# Allegro board LAYOUT.brd
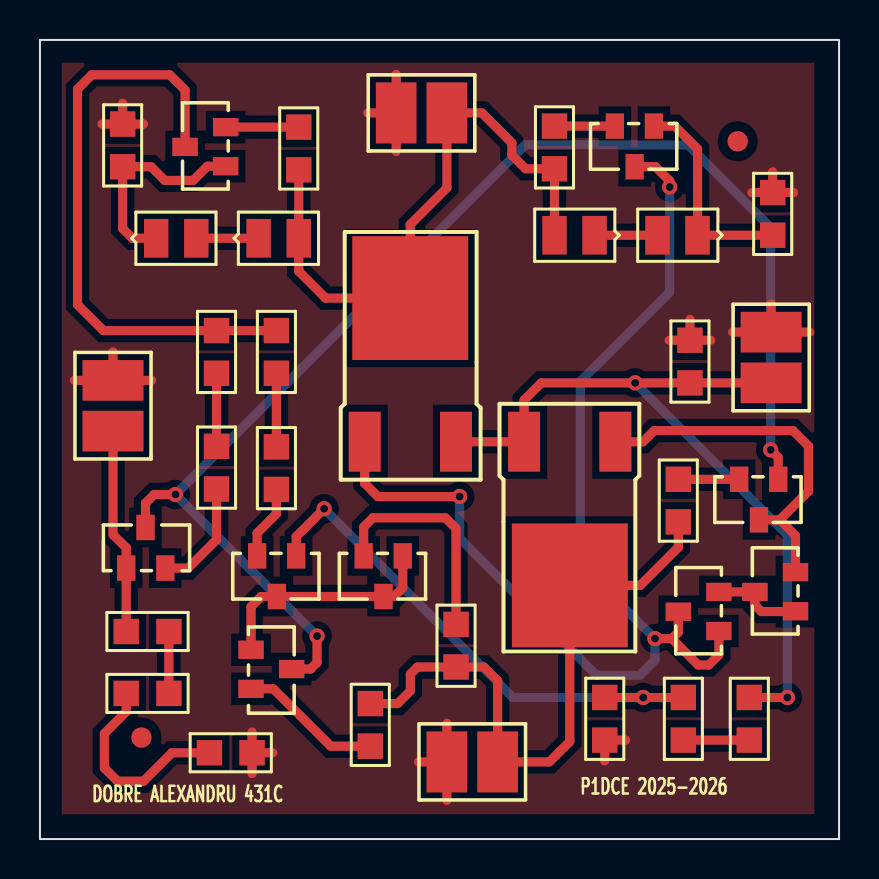
[diagram p0: board, top side]
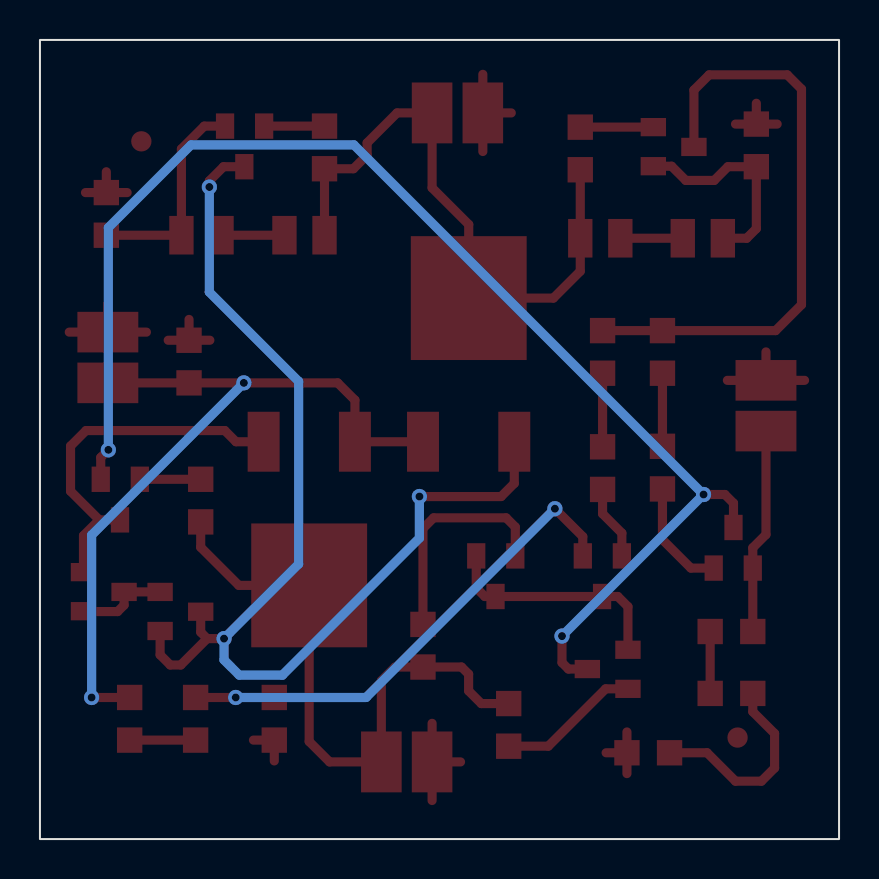
[diagram p1: board, bottom side, seen from below]

Outline 40 x 40 mm; copper layers: TOP, BOTTOM. Coordinates in mm from the lower left corner of the outline.
Outline path: rectangle 0,0 40,40

## Placement (name value [footprint] x y rotation side)
NOREF  -  [unnamed]  34.92 34.92 0 top
NOREF#2  -  [#2]  0 0 90 top
NOREF#3  -  [#2]  0 0 0 top
NOREF#4  -  [#2]  40 0 90 top
NOREF#5  -  [#2]  0 40 0 top
NOREF#6  -  [unnamed]  5.08 5.08 0 top
Q1  QBC856B  [TO236]  4.32 13.69 270 top
Q2  QBC856B  [TO236]  12.83 14.05 90 top
Q3  QBC846B  [TO236]  10.69 9.47 180 top
Q4  QBC846B  [TO236]  18.16 14.05 90 top
Q5  QBC856B  [TO236]  9.17 33.68 0 top
Q6  QBC846B  [TO236]  36.96 17.88 90 top
Q7  QBC856B  [TO236]  30.73 35.56 90 top
Q8  QMJD31C  [DPACK]  16.26 19.89 0 top
Q9  QMJD32CT4G  [DPACK]  28.8 19.89 180 top
Q10  QBC846B  [TO236]  33.86 10.41 0 top
Q11  QBC846B  [TO236]  37.69 11.4 0 top
R1  150  [SMR0805]  8.84 17.53 90 top
R2  150  [SMR0805]  11.84 17.5 90 top
R3  100  [SMR0805]  16.54 6.78 270 top
R4  100  [SMR0805]  20.83 8.61 90 top
R5  1k  [SMR0805]  12.95 35.64 270 top
R6  510  [SMR0805]  4.14 35.79 270 top
R7  100  [SMR0805]  25.76 35.69 270 top
R8  510  [SMR0805]  36.68 32.36 270 top
R9  51  [SMR0805]  31.95 15.88 90 top
R10  10k  [SMR0805]  32.21 7.09 270 top
R11  1k  [SMR0805]  28.27 4.95 90 top
R12  100  [SMR0805]  8.84 23.32 90 top
R13  100  [SMR0805]  11.84 23.32 90 top
R14  3.3k  [SMR0805]  35.51 4.95 90 top
RJ  100k  [SMR0805]  6.45 10.39 180 top
RJ1  2.2k  [SMR0805]  4.32 7.29 0 top
RJ2  2.7k  [SMR0805]  10.62 4.32 180 top
RL  10  [SMR0805]  32.54 24.97 270 top
U1  1N4148  [SMD0805]  10.95 30.07 0 top
U2  1N4148  [SMD0805]  5.82 30.07 0 top
U3  1N4148  [SMD0805]  27.76 30.23 180 top
U4  1N4148  [SMD0805]  32.92 30.23 180 top
VCC  CON2  [JUMPER2]  17.83 36.35 0 top
VEE  CON2  [JUMPER2]  20.37 3.86 0 top
VIN  CON2  [JUMPER2]  3.66 20.42 90 top
VOUT  CON2  [JUMPER2]  36.6 25.37 270 top

## Library data of the parts
Q1 Q2 Q5 Q7 = QBC856B_0
Q3 Q4 Q6 Q10 Q11 = QBC846B_0
Q8 = QMJD31C_0
Q9 = QMJD32CT4G_0
R1-R14 RJ RJ1 RJ2 RL = R
U1-U4 = 1N4148_0
VCC VEE VIN VOUT = CON2: User Part Number: ***

## Footprints (pads in the part's own frame, mm; a bottom-side part is the same pattern mirrored in y, then rotated)
DPACK
  rect 1.6x3 smd: 1(0,0) 3(4.57,0)
  rect 5.8x6.2 smd: 2(2.28,7.19)
JUMPER2
  rect 2.032x3.048 smd: 1(0,0) 2(2.54,0)
SMD0805
  rect 1.219x1.93 smd: A(2.007,0) C(0,0)
SMR0805
  rect 1.27x1.27 smd: 1(0,0) 2(2.134,0)
TO236
  rect 1.27x0.914 smd: 1(0.127,0) 2(0.127,1.956) 3(-1.905,0.965)
unnamed
  round 1.016 smd: (0,0)

## Nets
VCC: Q8.2 R5.2 R7.2 U1.A U3.A VCC.2
VEE: Q9.2 R3.1 R4.1 R9.1 VEE.2
0: R6.1 R8.1 R11.1 RJ2.1 RL.1 VCC.1 VEE.1 VIN.2 VOUT.1
V+: Q1.1 RJ.2 VIN.1
V-: Q2.1 R10.1 R11.2
VOUT: Q8.3 Q9.3 R14.2 RL.2 VOUT.2
N30156: Q7.2 R7.1
N30166: Q7.3 Q8.1 Q10.1 Q10.3
N30178: Q5.2 R5.1
N30200: Q5.1 R6.2 U2.C
N30210: Q7.1 R8.2 U4.C
N30220: Q5.3 R12.2 R13.2
N30316: Q10.2 Q11.1 Q11.3
N30350: Q1.2 R1.1
N30356: Q2.2 R2.1
N30362: Q6.3 Q9.1 Q11.2
N30394: Q1.3 Q3.3 Q6.1
N30398: Q2.3 Q3.1 Q4.1 Q4.3
N30418: RJ.1 RJ1.2
N30450: Q6.2 R9.2
N30472: Q3.2 R3.2
N30478: Q4.2 R4.2
N32272: U1.C U2.A
N32340: U3.C U4.A
N289748: R1.2 R12.1
N289752: R2.2 R13.1
N289879: R10.2 R14.1
N290150: RJ1.1 RJ2.2

## Via types
v1: diameter 0.762, hole 0.4, TOP to BOTTOM, 10 vias

## Routing (per net, layer and track width the routed paths; a pad name or vN(x,y) marks a point on that pad's centre or on a via; arc(x,y) is an arc through that point)
VCC: length 31.5
  TOP w0.457: U3.A R7.2 24.31,33.55 23.62,34.24 23.62,34.85 22.12,36.35 VCC.2 20.37,32.6 18.54,30.76 Q8.2 14.3,27.08 12.95,28.42 U1.A R5.2
VEE: length 31.3
  TOP w0.457: R9.1 31.95,14.61 30.05,12.7 Q9.2 26.52,4.88 25.5,3.86 VEE.2 22.91,7.92 22.23,8.61 R4.1 18.9,8.61 18.54,8.26 18.54,7.42 17.91,6.78 R3.1
0: length 35.7
  TOP w0.457: RJ2.1 10.62,5.36 ; RJ2.1 11.66,4.32 ; RJ2.1 10.62,3.28 ; 1.73,22.96 VIN.2 ; VIN.2 5.59,22.96 ; VIN.2 3.66,24.38 ; R8.1 36.68,33.4 ; R8.1 35.64,32.36 ; R8.1 37.72,32.36 ; VCC.1 17.83,38.28 ; VCC.1 16.41,36.35 ; VCC.1 17.83,34.42 ; 18.95,3.86 VEE.1 ; VEE.1 20.37,5.79 ; VEE.1 20.37,1.93 ; 29.31,4.95 R11.1 28.27,3.91 ; 34.67,25.37 VOUT.1 ; VOUT.1 38.53,25.37 ; VOUT.1 36.6,26.8 ; 31.5,24.97 RL.1 ; RL.1 32.54,26.01 ; RL.1 33.58,24.97 ; R6.1 5.18,35.79 ; R6.1 3.1,35.79 ; R6.1 4.14,36.83
V+: length 10.3
  TOP w0.457: VIN.1 3.66,15.24 4.32,14.58 Q1.1 RJ.2
V-: length 26.8
  TOP w0.457: R10.1 v1(30.2,7.09) R11.2 ; Q2.1 12.83,15.14 v1(14.22,16.54)
  BOTTOM w0.457: v1(14.22,16.54) 23.67,7.09 v1(30.2,7.09)
VOUT: length 39
  TOP w0.457: Q8.3 Q9.3 24.23,21.97 25.1,22.83 v1(29.79,22.83) RL.2 VOUT.2 ; R14.2 v1(37.41,7.09)
  BOTTOM w0.457: v1(37.41,7.09) 37.41,15.21 v1(29.79,22.83)
N30156: length 3
  TOP w0.457: R7.1 Q7.2
N30166: length 58.2
  TOP w0.457: Q8.1 16.26,17.8 16.91,17.14 v1(21.01,17.14) ; Q10.3 31.95,10.36 31.63,10.03 ; Q7.3 30.81,33.66 31.52,32.94 v1(31.52,32.64) ; 31.63,10.03 v1(30.78,10.03) ; 31.63,10.03 32.95,8.71 33.48,8.71 33.99,9.22 Q10.1
  BOTTOM w0.457: v1(21.01,17.14) 21.01,15.06 27.86,8.2 30.02,8.2 30.78,8.97 v1(30.78,10.03) 27.05,13.77 27.05,22.91 31.52,27.38 v1(31.52,32.64)
N30178: length 3.7
  TOP w0.457: R5.1 Q5.2
N30200: length 10.7
  TOP w0.457: Q5.1 8.38,33.68 7.67,32.97 6.25,32.97 5.56,33.66 R6.2 4.14,30.56 4.62,30.07 U2.C
N30210: length 10.7
  TOP w0.457: R8.2 U4.C 32.92,34.54 31.78,35.69 Q7.1
N30220: length 30.1
  TOP w0.457: Q5.3 7.26,37.49 6.5,38.25 2.59,38.25 1.88,37.54 1.88,26.75 3.17,25.45 R12.2 R13.2
N30316: length 4.6
  TOP w0.457: Q11.1 37.8,11.39 36.11,11.39 35.79,11.71 Q11.3 Q10.2
N30350: length 5.7
  TOP w0.457: Q1.2 7.42,13.56 8.84,14.99 R1.1
N30356: length 3.7
  TOP w0.457: R2.1 11.84,16.28 10.87,15.32 Q2.2
N30362: length 18.5
  TOP w0.457: 37.03,15.98 Q6.3 ; 37.03,15.98 38.47,17.41 38.47,19.67 37.69,20.45 30.75,20.45 30.19,19.89 Q9.1 ; 37.03,15.98 37.82,15.19 Q11.2
N30394: length 67.2
  TOP w0.457: v1(36.58,19.48) 36.96,19.1 Q6.1 ; v1(6.78,17.25) 5.71,17.25 5.28,16.81 Q1.3 ; v1(13.87,10.16) 13.87,8.83 13.54,8.51 Q3.3
  BOTTOM w0.457: v1(13.87,10.16) v1(6.78,17.25) 24.28,34.75 32.44,34.75 36.58,30.61 v1(36.58,19.48)
N30398: length 11.7
  TOP w0.457: Q3.1 10.57,11.63 11.07,12.14 Q2.3 Q4.3 17.73,12.14 18.16,12.57 Q4.1
N30418: length 3.1
  TOP w0.457: RJ.1 RJ1.2
N30450: length 3
  TOP w0.457: Q6.2 R9.2
N30472: length 7.2
  TOP w0.457: Q3.2 11.68,7.52 14.55,4.65 R3.2
N30478: length 11.3
  TOP w0.457: Q4.2 16.21,15.62 16.66,16.08 20.29,16.08 20.83,15.54 R4.2
N32272: length 3.1
  TOP w0.457: U2.A U1.C
N32340: length 3.1
  TOP w0.457: U3.C U4.A
N289748: length 3.7
  TOP w0.457: R12.1 R1.2
N289752: length 3.7
  TOP w0.457: R13.1 R2.2
N289879: length 3.3
  TOP w0.457: R10.2 R14.1
N290150: length 10.3
  TOP w0.457: RJ1.1 4.32,6.38 3.23,5.28 3.23,3.56 3.89,2.9 5.18,2.9 6.6,4.32 RJ2.2

## Copper pours and planes (outline as drawn; the poured copper is in the pictures)
0 on TOP: 1.09,38.86 1.09,1.24 38.76,1.24 38.76,38.86 ; 5 cut-outs

## Text on the board
Ref Des/Silkscreen Top: DOBRE ALEXANDRU 431C | P1DCE 2025-2026
XSECTION_CHART: *  SURFACE - AIR 0 MIL | L1: TOP CONDUCTOR - COPPER 0.71 MIL | *  DIELECTRIC - FR-4 61.57 MIL | L2: BOTTOM CONDUCTOR - COPPER 0.71 MIL | DESIGN CROSS SECTION CHART | ___________________________ | TOTAL THICKNESS 62.99 MIL | 1-2 | FIGURE | SIZE | 15.74 | DRILL CHART: TOP to BOTTOM | ALL UNITS ARE IN MILS | PLATED | QTY | 10
